# Altium PCB bottom_pcb.PcbDoc
Units mil, origin at the board's own origin, x right, y up, seen from the top; angles counter-clockwise.
Board outline 5435.03 x 3065.14 mil, 2 copper layers (Top Layer, Bottom Layer); 55 components, 60 nets, 307 pads, 2 vias.
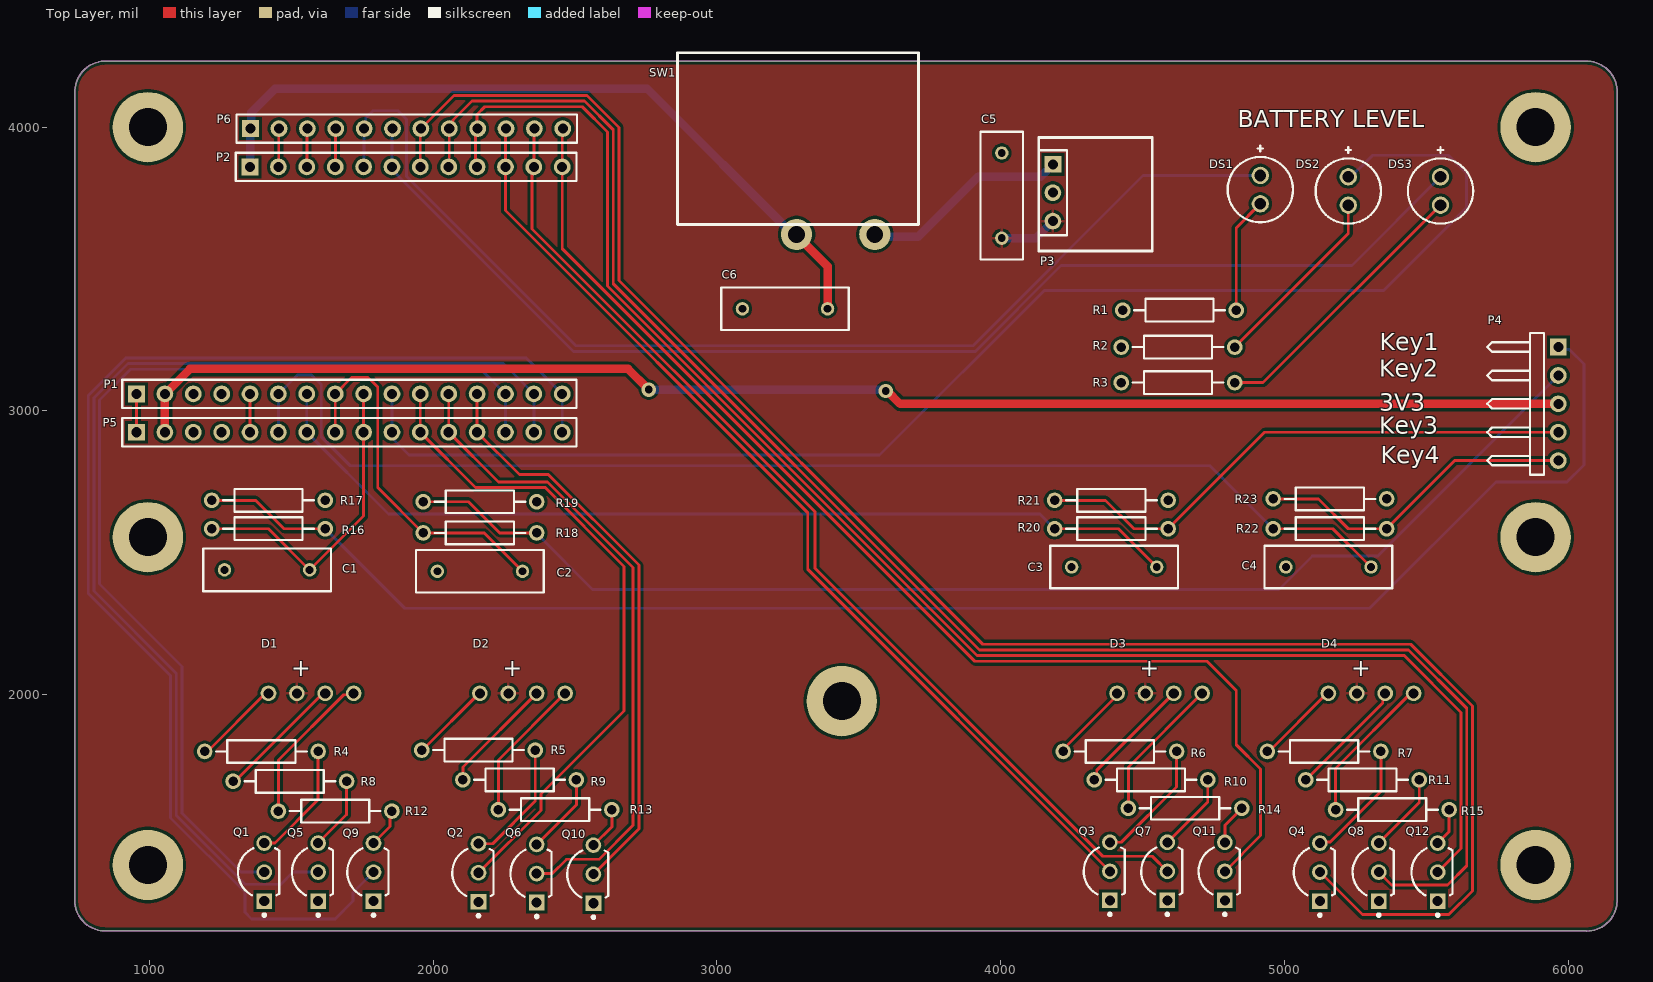
[diagram p0: Top Layer view]
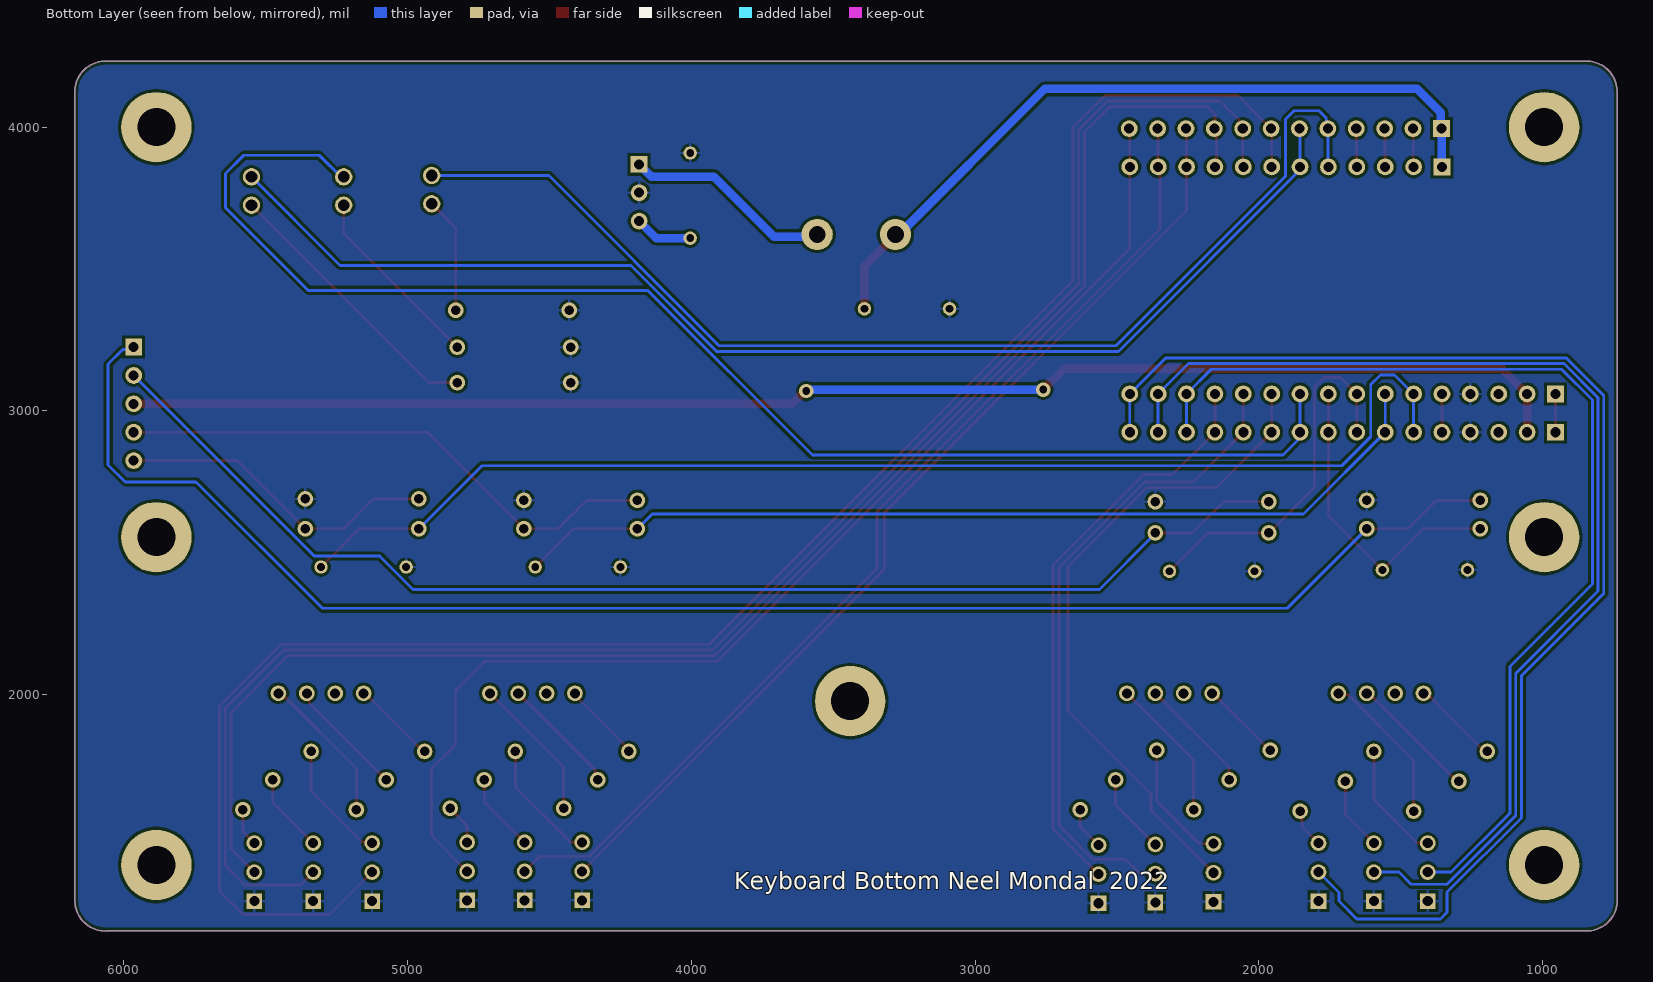
[diagram p1: Bottom Layer view, seen from below]

## Layer stack, top to bottom
Top Solder: solder mask 0.4, Solder Resist, Dk 3.5
Top Layer: signal copper 1.4
Dielectric 1: dielectric 12.6, FR-4, Dk 4.8
Bottom Layer: signal copper 1.4
Bottom Solder: solder mask 0.4, Solder Resist, Dk 3.5

## Board outline
737.49,1275 737.49,4129 cw(c740,4129) 737.59,4129.71 cw(c845,4125) 840.29,4232.41 cw(c841,4230) 841,4232.52 6070,4232.52 cw(c6070,4230) 6070.89,4232.35 cw(c6065,4125) 6172.35,4130.89 cw(c6170,4130) 6172.52,4130 6172.52,1273 cw(c6170,1273) 6172.32,1272.03 cw(c6064.84,1274.89) 6064.84,1167.38 cw(c6064.84,1169.89) 6064.11,1167.48 845,1167.48 cw(c845,1275)

## Design rules (kind name [scope] priority, off if disabled: settings)
Clearance [All] p1: gap=10 ignorepadtopadclearanceinfootprint=FALSE except(0: Arc-Hole Track-Hole SMDPad-Hole THPad-Hole Via-Hole Fill-Hole Poly-Hole Region-Hole Text-Hole)
HoleSize [All] p1: absolutevalues=TRUE maxlimit=196.85 minlimit=1 maxpercent=80.000 minpercent=20.000
PolygonConnect [All] p1: connectstyle=Relief reliefconductorwidth=10 reliefentries=4 polygonreliefangle="90 Angle" airgapwidth=10
RoutingVias [All] p1: holewidth=28 width=50 viastyle="Through Hole" minholewidth=28 minwidth=50 maxholewidth=28 maxwidth=50
SilkToSolderMaskClearance [IsPad] p1: minsilkscreentomaskgap=0 clearancetoexposedcopper=TRUE
SolderMaskExpansion [All] p1: expansion=4 istentingtop=FALSE
Width [All] p1: maxlimit=30 minlimit=10 preferedwidth=10
28 further rules are at their usual default settings.

## Components (designator, comment, footprint, x,y, rotation, side; value= is the part's Value field where it differs from the comment)
C1 "Cap" RAD-0.3 1415,2440 r180 top value=100nF
C2 "Cap" RAD-0.3 2165,2435 r180 top value=100nF
C3 "Cap" RAD-0.3 4400,2450 r180 top value=100nF
C4 "Cap" RAD-0.3 5155,2450 r180 top value=100nF
C5 "Cap" RAD-0.3 4004,3759 r270 top value=4.7uF
C6 "Cap" RAD-0.3 3240,3360 r180 top value=4.7uF
D1 "RGB LED" "New footprint 1" 1520,2005 r0 top
D2 "RGB LED" "New footprint 1" 2265,2005 r0 top
D3 "RGB LED" "New footprint 1" 4510,2005 r0 top
D4 "RGB LED" "New footprint 1" 5255,2005 r0 top
DS1 "HLMP-4740" AVAG-HLMP-4740 4915,3780 r270 top
DS2 "HLMP-4740" AVAG-HLMP-4740 5225,3775 r270 top
DS3 "HLMP-4740" AVAG-HLMP-4740 5550,3775 r270 top
P1 "Header 16" HDR1X16 955,3060 r0 top
P2 "Header 12" HDR1X12 1355,3860 r0 top
P3 "Header 3" HDR1X3 4184,3869 r270 top
P4 "Header 5H" HDR1X5H 5965,3225 r270 top
P5 "Header 16" HDR1X16 955,2925 r0 top
P6 "Header 12" HDR1X12 1357,3995 r0 top
Q1 "2N4401RLRAG" ONSC-TO-92-3-29-11_AM_BL 1405,1375 r90 top
Q2 "2N5087RLRAG" ONSC-TO-92-3-29-11_AM_BL 2160,1372.64 r90 top
Q3 "2N4401RLRAG" ONSC-TO-92-3-29-11_AM_BL 4385,1377.64 r90 top
Q4 "2N4401RLRAG" ONSC-TO-92-3-29-11_AM_BL 5125,1375 r90 top
Q5 "2N4401RLRAG" ONSC-TO-92-3-29-11_AM_BL 1595,1375 r90 top
Q6 "2N5087RLRAG" ONSC-TO-92-3-29-11_AM_BL 2365,1370 r90 top
Q7 "2N4401RLRAG" ONSC-TO-92-3-29-11_AM_BL 4587.5,1377.64 r90 top
Q8 "2N4401RLRAG" ONSC-TO-92-3-29-11_AM_BL 5332.5,1375 r90 top
Q9 "2N4401RLRAG" ONSC-TO-92-3-29-11_AM_BL 1790,1375 r90 top
Q10 "2N5087RLRAG" ONSC-TO-92-3-29-11_AM_BL 2565,1367.64 r90 top
Q11 "2N4401RLRAG" ONSC-TO-92-3-29-11_AM_BL 4790,1377.64 r90 top
Q12 "2N4401RLRAG" ONSC-TO-92-3-29-11_AM_BL 5540,1375 r90 top
R1 "Res2" AXIAL-0.4 4630,3355 r0 top value=470
R2 "Res2" AXIAL-0.4 4625,3225 r0 top value=470
R3 "Res2" AXIAL-0.4 4625,3100 r0 top value=470
R4 "Res2" AXIAL-0.4 1395,1800 r180 top value=220
R5 "Res2" AXIAL-0.4 2160,1805 r180 top value=220
R6 "Res2" AXIAL-0.4 4420,1800 r180 top value=220
R7 "Res2" AXIAL-0.4 5140,1800 r180 top value=220
R8 "Res2" AXIAL-0.4 1495,1695 r180 top value=510
R9 "Res2" AXIAL-0.4 2305,1700 r180 top value=510
R10 "Res2" AXIAL-0.4 4530,1700 r180 top value=510
R11 "Res2" AXIAL-0.4 5275,1700 r180 top value=510
R12 "Res2" AXIAL-0.4 1655,1590 r180 top value=220
R13 "Res2" AXIAL-0.4 2430,1595 r180 top value=220
R14 "Res2" AXIAL-0.4 4650,1600 r180 top value=220
R15 "Res2" AXIAL-0.4 5380,1595 r180 top value=220
R16 "Res2" AXIAL-0.4 1420,2585 r180 top value=4.7k
R17 "Res2" AXIAL-0.4 1420,2685 r180 top value=470
R18 "Res2" AXIAL-0.4 2165,2570 r180 top value=4.7k
R19 "Res2" AXIAL-0.4 2165,2680 r180 top value=470
R20 "Res2" AXIAL-0.4 4390,2585 r180 top value=4.7k
R21 "Res2" AXIAL-0.4 4390,2685 r180 top value=470
R22 "Res2" AXIAL-0.4 5160,2585 r180 top value=4.7k
R23 "Res2" AXIAL-0.4 5160,2690 r180 top value=470
SW1 "Rocker Switch - SPST (right-angle)" "Rocker Switch - SPST (right-angle)-Footprint-1" 3281,3622 r0 top

## Footprints (in the part's own frame and the unit in brackets; to place one, negate y for a bottom-side part, rotate by r counter-clockwise, add the part's x,y. Pads: shape width x height; smd on the part's side, far side on the other; paste and mask are expansions set on the pad)
AVAG-HLMP-4740 [mm] "THD, 2-Leads, Dia 5.845mm, Pitch 2.54mm"
  round 1.55 hole 1.05: 1(-1.27,0) 2(1.27,0)
  silkscreen extent -3.92,-2.92 2.92,2.92
AXIAL-0.4 [mm] "Axial Device, Thru-Hole; 2 Leads; 0.4 in Pin Spacing"
  round 1.4 hole 0.85: 1(-5.08,0) 2(5.08,0)
  silkscreen extent -4.06,-1.02 4.06,1.02
HDR1X3 [mm] "Connector; Header; 3 Position"
  rect 1.5x1.5 hole 0.9: 1(0,0)
  round 1.5 hole 0.9: 2(2.54,0) 3(5.08,0)
  silkscreen extent -1.27,-1.27 6.35,1.27
HDR1X5H [mm] "Connector; Header; 5 Position; Right Angle"
  rect 1.5x1.5 hole 0.9: 1(0,0)
  round 1.5 hole 0.9: 2(2.54,0) 3(5.08,0) 4(7.62,0) 5(10.16,0)
  silkscreen extent -1.27,-6.35 11.43,-1.27
HDR1X12 [mm] "Connector; Header; 12 Position"
  rect 1.5x1.5 hole 0.9: 1(0,0)
  round 1.5 hole 0.9: 2(2.54,0) 3(5.08,0) 4(7.62,0) 5(10.16,0) 6(12.7,0) 7(15.24,0) 8(17.78,0) 9(20.32,0) 10(22.86,0) 11(25.4,0) 12(27.94,0)
  silkscreen extent -1.27,-1.27 29.21,1.27
HDR1X16 [mm] "Connector; Header; 16 Position"
  rect 1.5x1.5 hole 0.9: 1(0,0)
  round 1.5 hole 0.9: 2(2.54,0) 3(5.08,0) 4(7.62,0) 5(10.16,0) 6(12.7,0) 7(15.24,0) 8(17.78,0) 9(20.32,0) 10(22.86,0) 11(25.4,0) 12(27.94,0) 13(30.48,0) 14(33.02,0) 15(35.56,0) 16(38.1,0)
  silkscreen extent -1.27,-1.27 39.37,1.27
"New footprint 1" [mm]
  round 1.4 hole 0.9: 1(-2.54,0) 2(0,0) 3(2.54,0) 4(5.08,0)
ONSC-TO-92-3-29-11_AM_BL [mm] "TO, 3-Leads, Body Dia 4.7mm, Pitch 2.6mm"
  rect 1.4x1.4 hole 0.9: 1(-2.6,0)
  round 1.4 hole 0.9: 2(0,0) 3(2.6,0)
  silkscreen extent -3.97,-1.34 2.13,2.35, body extent -2.84,-1.34 2.84,2.35, height 5.33
RAD-0.3 [mm] "Radial Cap, Thru-Hole; 2 Leads; 0.3 in Pin Spacing"
  round 1.2 hole 0.7: 1(-3.81,0) 2(3.81,0)
  silkscreen extent -5.71,-1.91 5.71,1.91
"Rocker Switch - SPST (right-angle)-Footprint-1" [mil]
  round 110 hole 59.06: 1(0,0) 2(275.59,0)
  silkscreen extent -420,35 430,640, body extent -420,35 425,642, height 583

## Part data
C1 C2 C3 C4 C5 C6: "Capacitor", LatestRevisionDate=17-Jul-2002, LatestRevisionNote="Re-released for DXP Platform.", PackageDescription="Radial Cap, Thru-Hole; 2 Leads; 0.3 in Pin Spacing", PackageReference=RAD-0.3, Published=8-Jun-2000, Publisher="Altium Limited"
D1 D2 D3 D4: library part CMP-007-00036-1, "4-pin common anode RGB LED"
DS1 DS2 DS3: library part CMP-2000-06413-1, "T-1 3/4 (5 mm) Low Current LED Lamp, Green, 1.9 V, -20 to 100 degC, 2-Pin THD, RoHS, Bulk", Color=Green, Dominant Wavelength/Color Temperature=569nm, Manufacturer=AvagoTechnologies, Package=2T-13/4, Package Description="2-Pin Through Hole Device, Dia 5.845 mm, Pitch 2.54 mm", Category=LEDs, Datasheet URL=http://docs.avagotech.com/docs/AV02-1557EN, Datasheet Version=07/2014, Intensity=2.3mcd, Lens Appearance=ColoredDiffused, Lens Shape Type=Circular, Manufacturer URL=http://www.avagotech.com/, Mounting=ThroughHole, Mounting Orientation=TopMount, Mounting Technology=ThroughHole, Number of LEDs=1, Package Reference=HLMP-4740, Packaging=Bulk, Peak Wavelength=565nm, Pin Count=2, Rad Hard=No, Type=Uni-Color, Viewing Angle=50°
P1 P5: "Header, 16-Pin", LatestRevisionDate=17-Jul-2002, LatestRevisionNote="Re-released for DXP Platform.", Publisher="Altium Limited"
P2 P6: "Header, 12-Pin", LatestRevisionDate=17-Jul-2002, LatestRevisionNote="Re-released for DXP Platform.", Publisher="Altium Limited"
P3: "Header, 3-Pin", LatestRevisionDate=17-Jul-2002, LatestRevisionNote="Re-released for DXP Platform.", Publisher="Altium Limited"
P4: "Header, 5-Pin, Right Angle", LatestRevisionDate=17-Jul-2002, LatestRevisionNote="Re-released for DXP Platform.", Publisher="Altium Limited"
Q1 Q3 Q4 Q5 Q7 Q8 Q9 Q11 Q12: library part CMP-1048-01482-1, "General Purpose Transistor, NPN Silicon, 3-Pin TO-92, Pb-Free, Tape and Reel", Manufacturer="On Semiconductor", ComponentLink1Description="Manufacturer URL", ComponentLink1URL=http://www.onsemi.com/, ComponentLink2Description=Datasheet, ComponentLink2URL=http://www.onsemi.com/pub_link/Collateral/2N4401-D.PDF, ComponentLink3Description="Package Specification", ComponentLink3URL=http://www.onsemi.com/pub_link/Collateral/MAC97-D.PDF, DatasheetVersion="Rev. 4", fT Min (MHz)=250, IC Continuous (A)=0.6, Mounting Technology="Through Hole", PackageDescription="3-Pin Transistor Outline, Body 4.825 x 3.685 mm, Pitch 1.27 mm", PackageReference=TO-92-3-29-11_AM_BL, PackageVersion="Rev. AM", Packing="Tape and Reel", PartNumber=2N4401RLRAG, Polarity=NPN, RoHS=TRUE
Q2 Q6 Q10: library part CMP-1048-01483-1, "Amplifier Transistor, PNP Silicon, 3-Pin TO-92, Pb-Free, Tape and Reel", Manufacturer="On Semiconductor", ComponentLink1Description="Manufacturer URL", ComponentLink1URL=http://www.onsemi.com/, ComponentLink2Description=Datasheet, ComponentLink2URL=http://www.onsemi.com/pub_link/Collateral/2N5087-D.PDF, ComponentLink3Description="Package Specification", ComponentLink3URL=http://www.onsemi.com/pub_link/Collateral/MAC97-D.PDF, DatasheetVersion="Rev. 5", fT Min (MHz)=40, IC Continuous (A)=0.05, Mounting Technology="Through Hole", PackageDescription="3-Pin Transistor Outline, Body 4.825 x 3.685 mm, Pitch 1.27 mm", PackageReference=TO-92-3-29-11_AM_BL, PackageVersion="Rev. AM", Packing="Tape and Reel", PartNumber=2N5087RLRAG, Polarity=PNP, RoHS=TRUE
R1 R2 R3 R4 R5 R6 R7 R8 R9 R10 R11 R12 R13 R14 R15 R16 R17 R18 R19 R20 R21 R22 R23: "Resistor", LatestRevisionDate=17-Jul-2002, LatestRevisionNote="Re-released for DXP Platform.", PackageDescription="Axial Device, Thru-Hole; 2 Leads; 0.4 in Pin Spacing", PackageReference=AXIAL-0.4, Published=8-Jun-2000, Publisher="Altium Limited"
SW1: library part CMP-011-00016-1, "Rated up to 15A @ 125V"

## Free pads (board coordinates)
  round 2.5 on Mech10: 1(740,1275) 1(740,1275) 1(740,2665) 1(740,2665) 1(845,1170) 1(845,1170) 1(845,2770) 1(845,2770) 1(6065,1170) 1(6065,1170) 1(6065,2770) 1(6065,2770) 1(6170,1275) 1(6170,1275) 1(6170,2665) 1(6170,2665)
  round 5 on Mech7: 1(1250,1935) 1(1250,1935) 1(1865,1935) 1(1865,1935)
  round 5 on Mech10: 1(1265,1915) 1(1265,1915) 1(1265,2530) 1(1265,2530) 1(1880,1915) 1(1880,1915) 1(1880,2530) 1(1880,2530) 1(2015,1910) 1(2015,1910) 1(2015,2530) 1(2015,2530) 1(2630,1910) 1(2630,1910) 1(2630,2530) 1(2630,2530) 1(4255,1915) 1(4255,1915) 1(4255,2530) 1(4255,2530) 1(4875,1915) 1(4875,1915) 1(4875,2530) 1(4875,2530) 1(5005,1915) 1(5005,1915) 1(5005,2530) 1(5005,2530) 1(5620,1915) 1(5620,1915) 1(5620,2530) 1(5620,2530)
  round 15 on Mech10: 1(1670,2425) 1(1915,2670) 1(1915,2670) 1(2418.03,2425) 1(3530,2425) 1(3530,2425) 1(3675,2670) 1(3775,2670) 1(3975,2670) 1(4075,2670) 1(4135,2510) 1(4135,2510) 1(4577.13,2510) 1(4577.13,2510) 1(4662.13,2425) 1(5165.16,2670) 1(5165.16,2670) 1(5410.16,2425)
  round 3.94 on Mech10: 1(3625,2570) 1(3625,2570) 1(3625,2620) 1(3625,2620) 1(3658.33,2436.67) 1(3658.33,2436.67) 1(3658.33,2570) 1(3675,2420) 1(3675,2420) 1(3691.67,2436.67) 1(3691.67,2436.67) 1(3691.67,2570) 1(3758.33,2436.67) 1(3758.33,2436.67) 1(3758.33,2570) 1(3775,2420) 1(3775,2420) 1(3791.67,2436.67) 1(3791.67,2436.67) 1(3791.67,2570) 1(3858.33,2436.67) 1(3858.33,2436.67) 1(3858.33,2570) 1(3875,2420) 1(3875,2420) 1(3891.67,2436.67) 1(3891.67,2436.67) 1(3891.67,2570) 1(3958.33,2436.67) 1(3958.33,2436.67) 1(3958.33,2570) 1(3975,2420) 1(3975,2420) 1(3991.67,2436.67) 1(3991.67,2436.67) 1(3991.67,2570) 1(4058.33,2436.67) 1(4058.33,2436.67) 1(4058.33,2570) 1(4075,2420) 1(4075,2420) 1(4091.67,2436.67) 1(4091.67,2436.67) 1(4091.67,2570) 1(4125,2570) 1(4125,2570) 1(4125,2620) 1(4125,2620)
  round 248.03 hole 133.86: 2(995,1400) 2(995,2555) 2(995,4000) 2(3440.08,1977.48) 2(5885.16,1400) 2(5885.16,2555) 2(5885.16,4000)

## Via types
v1: diameter 50, hole 28, Top Layer to Bottom Layer, 2 vias

## Nets (pads, with @x,y where several pads share a name; then routed paths per layer and width w, separated by ;. In a path a pad name is that pad's centre, name@x,y a point inside that pad or via, vN(x,y) a via of type N, cw(c..) or ccw(c..) an arc to the next point about the centre after c; other vN are vias at no path point)
3V3: P1.2 P4.3 P5.2 | length 5132.4
  Top Layer w30: P5.2 P1.2 1143,3148 2687,3148 v1(2760,3075) ; v1(3595,3070) 3600.41,3070 3645.41,3025 P4.3
  Bottom Layer w30: v1(2760,3075) 3590,3075 v1(3595,3070)
5V: C5.2 D1.2 D2.2 D3.2 D4.2 P3.3 | length 204.9
  Bottom Layer w30: C5.2 4124,3609 P3.3
B1: P1.16 P5.16 Q9.2 | length 4511.4
  Bottom Layer w10: Q9.2 1718.18,1303.18 1718.18,1273.18 1655,1210 1360,1210 1336.72,1233.28 1336.72,1304.28 1075,1566 1075,2066.72 785,2356.72 785,3055 917,3187 2328,3187 P1.16 P5.16
B2: P1.13 P5.13 Q10.2 | length 2054.2
  Top Layer w10: P1.13 P5.13 2304.3,2775.7 2405.87,2775.7 2725,2456.57 2725,1527.64 Q10.2
B3: P2.12 P6.12 Q11.2 | length 4181.3
  Top Layer w10: P6.12@2455,4008 2455,3960 P2.12 2455,3571.72 3908.72,2118 4727,2118 4830,2015 4830,1824 4916,1738 4916,1503.64 Q11.2
B4: P2.9 P6.9 Q12.2 | length 5473.2
  Top Layer w10: P2.9@2150,3852 2150,3988 P6.9 ; P6.9@2155,3995 2155,4045 2182,4072 2525.43,4072 2615,3982.43 2615,3440 3917,2138 5422,2138 5622.56,1937.44 5622.56,1457.56 Q12.2
EN: P2.2 P6.2 | length 135.8
  Top Layer w10: P2.2 1456,3861 1456,3994 P6.2
G1: P1.15 P5.15 Q5.2 | length 3989.5
  Bottom Layer w10: Q5.2 1506.36,1375 1463.8,1332.44 1336.84,1332.44 1095,1574.28 1095,2075 805,2365 805,3046.72 925.28,3167 2248,3167 P1.15 P5.15
G2: P1.12 P5.12 Q6.2 | length 2301.2
  Top Layer w10: P1.12 P5.12 2230,2750 2403.28,2750 2705,2448.28 2705,1540 2585,1420 2470,1420 2420,1370 Q6.2
G3: P2.11 P6.11 Q7.2 | length 3649.1
  Top Layer w10: P6.11@2355,3995 P2.11 2349,3854 2349,3641 3345.46,2644.54 3345.46,2445.46 4359.92,1431 4534.14,1431 Q7.2
G4: P2.8 P6.8 Q8.2 | length 5855.1
  Top Layer w10: P6.8@2055,3995 2055,4006.27 2069.99,4021.26 2069.99,4024.99 2137,4092 2533.72,4092 2635,3990.72 2635,3448.28 3925.28,2158 5437,2158 5642.56,1952.44 5642.56,1397.56 5575,1330 5377.5,1330 Q8.2 ; 2057,3892 P6.8
GND: C1.2 C2.2 C3.2 C4.2 C5.1 C6.2 P1.4 P3.2 P5.4 Q1.1 Q2.1 Q3.1 Q4.1 Q5.1 Q6.1 Q7.1 Q8.1 Q9.1 Q10.1 Q11.1 Q12.1 R1.1 R2.1 R3.1 R17.1 R19.1 R21.1 R23.1
HI_LED: DS1.1 P2.5 P6.5 | length 4047.9
  Bottom Layer w10: P2.5 1756,3861 1756,3994 P6.5 1762.49,4000.49 1762.49,4032.49 1788,4058 1876,4058 1906,4028 1906,3827 2503,3230 3902,3230 4502,3830 DS1.1
IO1: P1.5 P5.5 | length 135
  Top Layer w10: P5.5 P1.5
IO2: P2.4 P6.4 | length 135.8
  Top Layer w10: P2.4 1656,3861 1656,3994 P6.4
Key1: C1.1 P1.9 P5.9 R16.2 | length 1103.8
  Top Layer w10: R16.2 1420,2585 C1.1 1755,2630 P5.9 P1.9
Key1_RAW: P4.1 R16.1 R17.2 | length 5671.4
  Top Layer w10: R17.2 1375,2685 1475,2585 R16.1
  Bottom Layer w10: R16.1 1900,2305 5300,2305 5745,2750 5995,2750 6055,2810 6055,3165 6003.67,3216.33 5973.67,3216.33 P4.1
Key2: C2.1 P1.8 P5.8 R18.2 | length 1309.3
  Top Layer w10: P5.8 P1.8 1713,3118 1771,3118 1805,3084 1805,2730 R18.2 2180,2570 C2.1
Key2_RAW: P4.2 R18.1 R19.2 | length 4441.2
  Top Layer w10: R19.2 2125,2680 2235,2570 R18.1
  Bottom Layer w10: R18.1 2365,2568.23 2562.01,2371.22 4980.84,2371.22 5098.24,2488.62 5328.62,2488.62 P4.2
Key3: C3.1 P1.7 P5.7 R20.2 | length 3326.8
  Top Layer w10: R20.2 4415,2585 C3.1
  Bottom Layer w10: P1.7 P5.7 1842.56,2637.44 4137.56,2637.44 R20.2
Key3_RAW: P4.4 R20.1 R21.2 | length 1957.3
  Top Layer w10: R21.2 4370,2685 4470,2585 R20.1 4930,2925 P4.4
Key4: C4.1 P1.6 P5.6 R22.2 | length 4401
  Top Layer w10: R22.2 5170,2585 C4.1
  Bottom Layer w10: P5.6 P1.6 1522,3127 1572,3127 1606,3093 1606,2909 1708,2807 4738,2807 R22.2
Key4_RAW: P4.5 R22.1 R23.2 | length 1147.9
  Top Layer w10: R23.2 5120,2690 5225,2585 R22.1 5600,2825 P4.5
LOW_LED: DS3.1 P2.6 P6.6 | length 4360.8
  Bottom Layer w10: P6.6 1855,3993 1855,3849.72 2494.72,3210 3910.28,3210 4212.9,3512.62 5237.62,3512.62 DS3.1
MED_LED: DS2.1 P1.10 P5.10 | length 4921.6
  Bottom Layer w10: P1.10 P5.10 1864.39,2915.61 1864.39,2895.61 1915,2845 3573.57,2845 4153.57,3425 5350,3425 5641,3716 5641,3837 5577,3901 5311,3901 5235,3825 DS2.1
NetD1_1: D1.1 R4.2 | length 309.9
  Top Layer w10: R4.2 1205,1800 1410,2005 D1.1
NetD1_3: D1.3 R8.2 | length 453.4
  Top Layer w10: R8.2 1302.5,1695 1612.5,2005 D1.3
NetD1_4: D1.4 R12.2 | length 542.3
  Top Layer w10: R12.2 1455,1770 1684.91,1999.91 1714.91,1999.91 D1.4
NetD2_1: D2.1 R5.2 | length 287.8
  Top Layer w10: R5.2 1962.5,1805 2162.5,2005 D2.1
NetD2_3: D2.3 R9.2 | length 412.7
  Top Layer w10: R9.2 2105,1745 D2.3
NetD2_4: D2.4 R13.2 | length 507.3
  Top Layer w10: R13.2 2230,1770 D2.4
NetD3_1: D3.1 R6.2 | length 283.7
  Top Layer w10: R6.2 4220,1807.5 4410,1997.5 D3.1
NetD3_3: D3.3 R10.2 | length 421
  Top Layer w10: R10.2 4338.63,1708.63 4338.63,1733.63 D3.3
NetD3_4: D3.4 R14.2 | length 512.7
  Top Layer w10: R14.2 4450,1745 D3.4
NetD4_1: D4.1 R7.2 | length 299.9
  Top Layer w10: R7.2 4945,1800 5150,2005 D4.1
NetD4_3: D4.3 R11.2 | length 421
  Top Layer w10: R11.2 5346.37,1971.37 5346.37,1996.37 D4.3
NetD4_4: D4.4 R15.2 | length 529.8
  Top Layer w10: R15.2 5180,1740 5445,2005 D4.4
NetDS1_2: DS1.2 R1.2 | length 410.2
  Top Layer w10: R1.2 4830,3645 DS1.2
NetDS2_2: DS2.2 R2.2 | length 665.7
  Top Layer w10: R2.2 5225,3625 DS2.2
NetDS3_2: DS3.2 R3.2 | length 983.9
  Top Layer w10: R3.2 4925,3100 DS3.2
NetQ1_3: Q1.3 R4.1 | length 423.2
  Top Layer w10: Q1.3 1442.36,1477.36 1595,1630 R4.1
NetQ2_3: Q2.3 R5.1 | length 442.1
  Top Layer w10: Q2.3 2210,1475 2360,1625 R5.1
NetQ3_3: Q3.3 R6.1 | length 440.8
  Top Layer w10: Q3.3 4425,1480 4620,1675 R6.1
NetQ4_3: Q4.3 R7.1 | length 430.7
  Top Layer w10: Q4.3 5128.91,1481.27 5161.27,1481.27 5340,1660 R7.1
NetQ5_3: Q5.3 R8.1 | length 259.1
  Top Layer w10: Q5.3 1695,1577.36 R8.1
NetQ6_3: Q6.3 R9.1 | length 285.6
  Top Layer w10: Q6.3 2505,1612.36 R9.1
NetQ7_3: Q7.3 R10.1 | length 279
  Top Layer w10: Q7.3 4730,1622.5 R10.1
NetQ8_3: Q8.3 R11.1 | length 281.7
  Top Layer w10: Q8.3 5475,1619.86 R11.1
NetQ9_3: Q9.3 R12.1 | length 139.6
  Top Layer w10: Q9.3 1847.87,1535.23 1847.87,1582.87 R12.1
NetQ10_3: Q10.3 R13.1 | length 151.9
  Top Layer w10: Q10.3 2630,1535 R13.1
NetQ11_3: Q11.3 R14.1 | length 144.9
  Top Layer w10: Q11.3 4790,1540 R14.1
NetQ12_3: Q12.3 R15.1 | length 134.2
  Top Layer w10: Q12.3 5580,1517.36 R15.1
R1: P1.14 P5.14 Q1.2 | length 3598
  Bottom Layer w10: Q1.2 1322.57,1375 1115,1582.57 1115,2100 825,2390 825,3038.43 933.57,3147 2168,3147 P1.14 P5.14
R2: P1.11 P5.11 Q2.2 | length 2340.4
  Top Layer w10: P1.11 P5.11 2150,2730 2395,2730 2672.56,2452.44 2672.56,1942.56 2380,1650 2380,1592.64 Q2.2
R3: P2.10 P6.10 Q3.2 | length 3491.6
  Top Layer w10: P6.10@2255,3987 P2.10 2255,3706.72 3320.38,2641.34 3320.38,2442.26 Q3.2
R4: P2.7 P6.7 Q4.2 | length 6372.3
  Top Layer w10: P2.7@1955,3870 P6.7@1955,3995 ; P6.7 2074,4112 2542,4112 2655,3999 2655,3460 3937,2178 5445.28,2178 5662.56,1960.73 5662.56,1308.56 5579,1225 5275,1225 Q4.2
RESET: P1.1 P5.1 | length 135
  Top Layer w10: P5.1 P1.1
VBAT: C6.1 P2.1 P6.1 SW1.1 | length 2721.8
  Top Layer w30: SW1.1@3253.28,3646.72 3390,3510 C6.1
  Bottom Layer w30: P2.1@1355,3850 P2.1 1355,3995 1358.95,3998.95 1358.95,4051.95 1442,4135 2755,4135 SW1.1@3281.42,3608.58
VBAT_POSTSW: P3.1 SW1.2 | length 750.2
  Bottom Layer w30: SW1.2@3550.16,3640 3576.16,3614 3709,3614 3921,3826 4141,3826 P3.1
VUSB: P2.3 P6.3 | length 135.8
  Top Layer w10: P2.3 1556,3861 1556,3994 P6.3
pads on no net: P1.3 P5.3

## Polygon pours and split planes (outlines as drawn)
GND on Bottom Layer "GND_L02_P000" (solid, pour order 0): 737,1177.71 737,4234 6172.52,4234 6167,1177.71
5V on Top Layer "5V_L01_P001" (solid, pour order 1): 740,4225 741,4224 741,1165 6174,1165 6174,1167 6174,4233

## Keep-outs
Keep-Out Layer:
  the board outline again, w5

## Silkscreen, mask and mechanical layers (free items; w line width, h text height)
Top Overlay:
  lines w10: 4134,3564 4534,3564 4534,3964 4134,3964 4134,3564
  text "BATTERY LEVEL" at 4835,4000 h60
  text "Key1" at 5335,3213.99 h60
  text "Key2" at 5334,3119.99 h60
  text "3V3" at 5334,3000 h60
  text "Key3" at 5334,2919.99 h60
  text "Key4" at 5339,2814.99 h60
Bottom Overlay:
  text "Keyboard Bottom Neel Mondal  2022" at 3849,1314 h60
Mechanical 1:
  lines w5: 740,4125 cw(c845,4125) 845,4230 ; 740,4129 740,1275 ccw(c845,1275) 845,1170 6067,1170 ; 841,4230 6070,4230 ; 6064.84,1169.89 ccw(c6064.84,1274.89) 6169.84,1274.89 ; 6065,4230 cw(c6065,4125) 6170,4125 ; 6170,1273 6170,4130
Mechanical 10:
  drawing of 1405 lines, arcs and shapes, not listed
  text "P1" at 3694.99,2834.99 h60 r90
  text "P1" at 3589.99,2664.99 h60 r90
  text "Key4" at 4095.01,2310 h60 r90
  text "Key2" at 3790.01,2305 h60 r90
  text "3V3" at 3910,2305 h60 r90
  text "Key3" at 3990.01,2305 h60 r90
  text "Key1" at 3685.01,2300 h60 r90

## Text inside footprints (layer, text, board x,y; h text height)
D1: Top Overlay "+" at 1500,2065 h60
D2: Top Overlay "+" at 2245,2065 h60
D3: Top Overlay "+" at 4490,2065 h60
D4: Top Overlay "+" at 5235,2065 h60